# Altium PCB PCB1.PcbDoc (part 2 of 3)
Units mil, origin at the board's own origin, x right, y up, seen from the top; angles counter-clockwise.
Board outline 3543.31 x 5118.11 mil, 2 copper layers (Top Layer, Bottom Layer); 56 components, 55 nets, 300 pads, 86 vias.
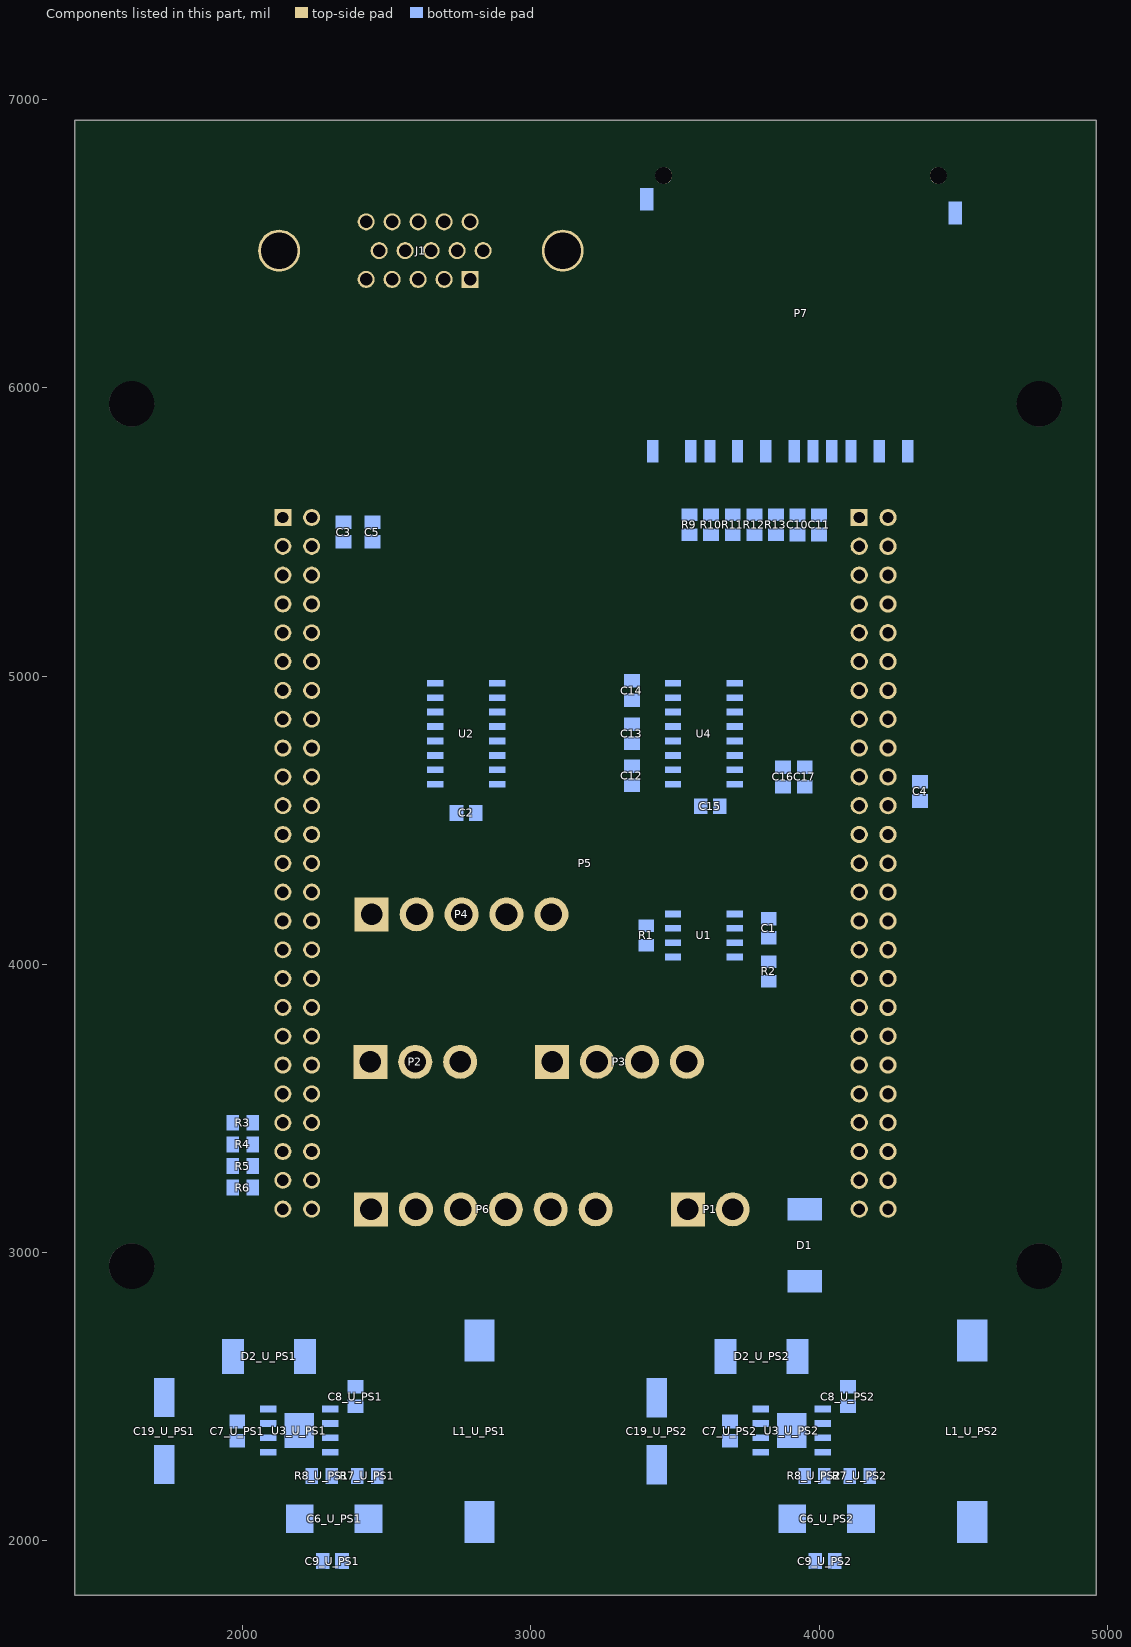
[diagram p2: the components of this part, seen from the top]

## Via types
v1: diameter 35.43/35.43 (per signal layer), hole 11.81, Top Layer to Bottom Layer, tented both sides, 52 vias
v2: diameter 47.24/47.24 (per signal layer), hole 19.68, Top Layer to Bottom Layer, tented both sides, 19 vias
v3: diameter 35.43, hole 11.81, Top Layer to Bottom Layer, tented top, 12 vias
v4: diameter 47.24/47.24 (per signal layer), hole 19.68, Top Layer to Bottom Layer, 3 vias

## Nets (pads, with @x,y where several pads share a name; then routed paths per layer and width w, separated by ;. In a path a pad name is that pad's centre, name@x,y a point inside that pad or via, vN(x,y) a via of type N, cw(c..) or ccw(c..) an arc to the next point about the centre after c; other vN are vias at no path point) (continued)
copper on no net: (continued)
  Bottom Layer w1: 1472.06,4827.6 1472.06,5448.6 ; 1473.06,4827.6 1473.06,5448.6 ; 1474.06,4827.6 1474.06,5448.6 ; 1475.06,4827.6 1475.06,5448.6 ; 1476.06,4827.6 1476.06,5448.6 ; 1477.06,4827.6 1477.06,5448.6 ; 1478.06,4827.6 1478.06,5448.6 ; 1479.06,4827.6 1479.06,5448.6 ; 1480.06,4827.6 1480.06,5448.6 ; 1481.06,4827.6 1481.06,5448.6 ; 1482.06,4827.6 1482.06,5448.6 ; 1483.06,4827.6 1483.06,5448.6 ; 1484.06,4827.6 1484.06,5448.6 ; 1485.06,4827.6 1485.06,5448.6 ; 1486.06,4827.6 1486.06,5448.6 ; 1487.06,4827.6 1487.06,5448.6 ; 1488.06,4827.6 1488.06,5448.6 ; 1489.06,4827.6 1489.06,5448.6 ; 1490.06,4827.6 1490.06,5448.6 ; 1491.06,4827.6 1491.06,5448.6 ; 1492.06,4827.6 1492.06,5448.6 ; 1493.06,4827.6 1493.06,5448.6 ; 1494.06,4827.6 1494.06,5448.6 ; 1495.06,4827.6 1495.06,5448.6 ; 1496.06,4827.6 1496.06,5448.6 ; 1497.06,4827.6 1497.06,5448.6 ; 1498.06,4827.6 1498.06,5448.6 ; 1499.06,4827.6 1499.06,5448.6 ; 1500.06,4827.6 1500.06,5448.6 ; 1501.06,4827.6 1501.06,5448.6 ; 1502.06,4827.6 1502.06,5448.6 ; 1503.06,4827.6 1503.06,5448.6 ; 1504.06,4827.6 1504.06,5448.6 ; 1505.06,4827.6 1505.06,5448.6 ; 1506.06,4827.6 1506.06,5448.6 ; 1507.06,4827.6 1507.06,5448.6 ; 1508.06,4827.6 1508.06,5448.6 ; 1509.06,4827.6 1509.06,5448.6 ; 1510.06,4827.6 1510.06,5327.6 ; 1510.06,5336.6 1510.06,5448.6 ; 1511.06,4827.6 1511.06,5324.6 ; 1511.06,5337.6 1511.06,5448.6 ; 1512.06,4827.6 1512.06,5321.6 ; 1512.06,5338.6 1512.06,5448.6 ; 1513.06,4827.6 1513.06,5319.6 ; 1513.06,5338.6 1513.06,5448.6 ; 1514.06,4827.6 1514.06,5317.6 ; 1514.06,5339.6 1514.06,5448.6 ; 1515.06,4827.6 1515.06,4861.6 ; 1515.06,4864.6 1515.06,4883.6 ; 1515.06,4910.6 1515.06,4957.6 ; 1515.06,4959.6 1515.06,4977.6 ; 1515.06,5007.6 1515.06,5017.6 ; 1515.06,5019.6 1515.06,5029.6 ; 1515.06,5031.6 1515.06,5072.6 ; 1515.06,5087.6 1515.06,5092.6 ; 1515.06,5121.6 1515.06,5316.6 ; 1515.06,5339.6 1515.06,5448.6 ; 1516.06,4827.6 1516.06,4860.6 ; 1516.06,4865.6 1516.06,4880.6 ; 1516.06,4913.6 1516.06,4955.6 ; 1516.06,4961.6 1516.06,4974.6 ; 1516.06,5009.6 1516.06,5015.6 ; 1516.06,5021.6 1516.06,5027.6 ; 1516.06,5033.6 1516.06,5069.6 ; 1516.06,5087.6 1516.06,5090.6 ; 1516.06,5124.6 1516.06,5314.6 ; 1516.06,5330.6 1516.06,5332.6 ; 1516.06,5339.6 1516.06,5448.6 ; 1517.06,4827.6 1517.06,4859.6 ; 1517.06,4866.6 1517.06,4878.6 ; 1517.06,4915.6 1517.06,4954.6 ; 1517.06,4961.6 1517.06,4972.6 ; 1517.06,5010.6 1517.06,5014.6 ; 1517.06,5022.6 1517.06,5026.6 ; 1517.06,5034.6 1517.06,5067.6 ; 1517.06,5087.6 1517.06,5089.6 ; 1517.06,5126.6 1517.06,5313.6 ; 1517.06,5328.6 1517.06,5333.6 ; 1517.06,5339.6 1517.06,5448.6 ; 1518.06,4827.6 1518.06,4859.6 ; 1518.06,4867.6 1518.06,4877.6 ; 1518.06,4916.6 1518.06,4954.6 ; 1518.06,4961.6 1518.06,4970.6 ; 1518.06,5010.6 1518.06,5014.6 ; 1518.06,5022.6 1518.06,5026.6 ; 1518.06,5034.6 1518.06,5066.6 ; 1518.06,5087.6 1518.06,5089.6 ; 1518.06,5127.6 1518.06,5312.6 ; 1518.06,5326.6 1518.06,5333.6 ; 1518.06,5339.6 1518.06,5448.6 ; 1519.06,4827.6 1519.06,4859.6 ; 1519.06,4867.6 1519.06,4876.6 ; 1519.06,4918.6 1519.06,4954.6 ; 1519.06,4961.6 1519.06,4969.6 ; 1519.06,5010.6 1519.06,5014.6 ; 1519.06,5022.6 1519.06,5026.6 ; 1519.06,5034.6 1519.06,5065.6 ; 1519.06,5087.6 1519.06,5089.6 ; 1519.06,5128.6 1519.06,5310.6 ; 1519.06,5325.6 1519.06,5334.6 ; 1519.06,5339.6 1519.06,5448.6 ; 1520.06,4827.6 1520.06,4859.6 ; 1520.06,4867.6 1520.06,4875.6 ; 1520.06,4919.6 1520.06,4954.6 ; 1520.06,4961.6 1520.06,4968.6 ; 1520.06,5010.6 1520.06,5014.6 ; 1520.06,5022.6 1520.06,5026.6 ; 1520.06,5034.6 1520.06,5064.6 ; 1520.06,5087.6 1520.06,5090.6 ; 1520.06,5129.6 1520.06,5309.6 ; 1520.06,5323.6 1520.06,5334.6 ; 1520.06,5339.6 1520.06,5448.6 ; 1521.06,4827.6 1521.06,4859.6 ; 1521.06,4867.6 1521.06,4874.6 ; 1521.06,4920.6 1521.06,4954.6 ; 1521.06,4961.6 1521.06,4968.6 ; 1521.06,5009.6 1521.06,5014.6 ; 1521.06,5022.6 1521.06,5026.6 ; 1521.06,5034.6 1521.06,5063.6 ; 1521.06,5087.6 1521.06,5090.6 ; 1521.06,5130.6 1521.06,5307.6 ; 1521.06,5322.6 1521.06,5333.6 ; 1521.06,5338.6 1521.06,5448.6 ; 1522.06,4827.6 1522.06,4859.6 ; 1522.06,4867.6 1522.06,4873.6 ; 1522.06,4885.6 1522.06,4908.6 ; 1522.06,4921.6 1522.06,4954.6 ; 1522.06,4961.6 1522.06,4967.6 ; 1522.06,4981.6 1522.06,5014.6 ; 1522.06,5022.6 1522.06,5026.6 ; 1522.06,5034.6 1522.06,5062.6 ; 1522.06,5075.6 1522.06,5080.6 ; 1522.06,5087.6 1522.06,5117.6 ; 1522.06,5131.6 1522.06,5305.6 ; 1522.06,5320.6 1522.06,5333.6 ; 1522.06,5338.6 1522.06,5448.6 ; 1523.06,4827.6 1523.06,4859.6 ; 1523.06,4867.6 1523.06,4873.6 ; 1523.06,4882.6 1523.06,4911.6 ; 1523.06,4921.6 1523.06,4954.6 ; 1523.06,4961.6 1523.06,4967.6 ; 1523.06,4976.6 1523.06,5014.6 ; 1523.06,5022.6 1523.06,5026.6 ; 1523.06,5034.6 1523.06,5061.6 ; 1523.06,5072.6 1523.06,5080.6 ; 1523.06,5087.6 1523.06,5122.6 ; 1523.06,5131.6 1523.06,5303.6 ; 1523.06,5319.6 1523.06,5333.6 ; 1523.06,5337.6 1523.06,5448.6 ; 1524.06,4827.6 1524.06,4859.6 ; 1524.06,4867.6 1524.06,4873.6 ; 1524.06,4881.6 1524.06,4912.6 ; 1524.06,4922.6 1524.06,4954.6 ; 1524.06,4961.6 1524.06,4966.6 ; 1524.06,4975.6 1524.06,5014.6 ; 1524.06,5022.6 1524.06,5026.6 ; 1524.06,5034.6 1524.06,5060.6 ; 1524.06,5070.6 1524.06,5079.6 ; 1524.06,5087.6 1524.06,5123.6 ; 1524.06,5131.6 1524.06,5300.6 ; 1524.06,5318.6 1524.06,5333.6 ; 1524.06,5337.6 1524.06,5448.6 ; 1525.06,4827.6 1525.06,4859.6 ; 1525.06,4867.6 1525.06,4872.6 ; 1525.06,4880.6 1525.06,4913.6 ; 1525.06,4923.6 1525.06,4954.6 ; 1525.06,4961.6 1525.06,4966.6 ; 1525.06,4974.6 1525.06,5014.6 ; 1525.06,5022.6 1525.06,5026.6 ; 1525.06,5034.6 1525.06,5059.6 ; 1525.06,5069.6 1525.06,5079.6 ; 1525.06,5087.6 1525.06,5123.6 ; 1525.06,5132.6 1525.06,5297.6 ; 1525.06,5320.6 1525.06,5333.6 ; 1525.06,5336.6 1525.06,5448.6 ; 1526.06,4827.6 1526.06,4859.6 ; 1526.06,4867.6 1526.06,4872.6 ; 1526.06,4880.6 1526.06,4914.6 ; 1526.06,4924.6 1526.06,4954.6 ; 1526.06,4961.6 1526.06,4966.6 ; 1526.06,4974.6 1526.06,5014.6 ; 1526.06,5022.6 1526.06,5026.6 ; 1526.06,5034.6 1526.06,5059.6 ; 1526.06,5068.6 1526.06,5079.6 ; 1526.06,5087.6 1526.06,5124.6 ; 1526.06,5132.6 1526.06,5294.6 ; 1526.06,5323.6 1526.06,5333.6 ; 1526.06,5335.6 1526.06,5448.6 ; 1527.06,4827.6 1527.06,4859.6 ; 1527.06,4867.6 1527.06,4872.6 ; 1527.06,4880.6 1527.06,4915.6 ; 1527.06,4924.6 1527.06,4954.6 ; 1527.06,4961.6 1527.06,4966.6 ; 1527.06,4974.6 1527.06,5014.6 ; 1527.06,5022.6 1527.06,5026.6 ; 1527.06,5034.6 1527.06,5058.6 ; 1527.06,5067.6 1527.06,5079.6 ; 1527.06,5087.6 1527.06,5124.6 ; 1527.06,5132.6 1527.06,5291.6 ; 1527.06,5325.6 1527.06,5448.6 ; 1528.06,4827.6 1528.06,4859.6 ; 1528.06,4867.6 1528.06,4872.6 ; 1528.06,4880.6 1528.06,4916.6 ; 1528.06,4925.6 1528.06,4954.6 ; 1528.06,4961.6 1528.06,4966.6 ; 1528.06,4974.6 1528.06,5014.6 ; 1528.06,5022.6 1528.06,5026.6 ; 1528.06,5034.6 1528.06,5057.6 ; 1528.06,5066.6 1528.06,5079.6 ; 1528.06,5087.6 1528.06,5124.6 ; 1528.06,5132.6 1528.06,5289.6 ; 1528.06,5327.6 1528.06,5448.6 ; 1529.06,4827.6 1529.06,4859.6 ; 1529.06,4867.6 1529.06,4872.6 ; 1529.06,4880.6 1529.06,4916.6 ; 1529.06,4926.6 1529.06,4954.6 ; 1529.06,4961.6 1529.06,4966.6 ; 1529.06,4974.6 1529.06,5014.6 ; 1529.06,5022.6 1529.06,5026.6 ; 1529.06,5034.6 1529.06,5056.6 ; 1529.06,5066.6 1529.06,5079.6 ; 1529.06,5087.6 1529.06,5124.6 ; 1529.06,5132.6 1529.06,5288.6 ; 1529.06,5328.6 1529.06,5448.6 ; 1530.06,4827.6 1530.06,4859.6 ; 1530.06,4867.6 1530.06,4872.6 ; 1530.06,4881.6 1530.06,4917.6 ; 1530.06,4926.6 1530.06,4954.6 ; 1530.06,4961.6 1530.06,4966.6 ; 1530.06,4974.6 1530.06,5014.6 ; 1530.06,5022.6 1530.06,5026.6 ; 1530.06,5034.6 1530.06,5056.6 ; 1530.06,5065.6 1530.06,5079.6 ; 1530.06,5087.6 1530.06,5124.6 ; 1530.06,5132.6 1530.06,5287.6 ; 1530.06,5329.6 1530.06,5448.6 ; 1531.06,4827.6 1531.06,4859.6 ; 1531.06,4867.6 1531.06,4873.6 ; 1531.06,4883.6 1531.06,4918.6 ; 1531.06,4927.6 1531.06,4954.6 ; 1531.06,4961.6 1531.06,4966.6 ; 1531.06,4974.6 1531.06,5014.6 ; 1531.06,5022.6 1531.06,5026.6 ; 1531.06,5034.6 1531.06,5055.6 ; 1531.06,5064.6 1531.06,5079.6 ; 1531.06,5087.6 1531.06,5124.6 ; 1531.06,5132.6 1531.06,5287.6 ; 1531.06,5330.6 1531.06,5448.6 ; 1532.06,4827.6 1532.06,4859.6 ; 1532.06,4867.6 1532.06,4873.6 ; 1532.06,4896.6 1532.06,4918.6 ; 1532.06,4927.6 1532.06,4954.6 ; 1532.06,4961.6 1532.06,4966.6 ; 1532.06,4974.6 1532.06,5014.6 ; 1532.06,5022.6 1532.06,5026.6 ; 1532.06,5034.6 1532.06,5054.6 ; 1532.06,5064.6 1532.06,5079.6 ; 1532.06,5087.6 1532.06,5101.6 ; 1532.06,5132.6 1532.06,5286.6 ; 1532.06,5331.6 1532.06,5448.6 ; 1533.06,4827.6 1533.06,4859.6 ; 1533.06,4867.6 1533.06,4873.6 ; 1533.06,4900.6 1533.06,4919.6 ; 1533.06,4928.6 1533.06,4954.6 ; 1533.06,4961.6 1533.06,4966.6 ; 1533.06,4974.6 1533.06,5014.6 ; 1533.06,5022.6 1533.06,5026.6 ; 1533.06,5034.6 1533.06,5054.6 ; 1533.06,5063.6 1533.06,5079.6 ; 1533.06,5087.6 1533.06,5099.6 ; 1533.06,5132.6 1533.06,5166.6 ; 1533.06,5168.6 1533.06,5285.6 ; 1533.06,5332.6 1533.06,5448.6 ; 1534.06,4827.6 1534.06,4859.6 ; 1534.06,4867.6 1534.06,4874.6 ; 1534.06,4902.6 1534.06,4920.6 ; 1534.06,4929.6 1534.06,4954.6 ; 1534.06,4961.6 1534.06,4966.6 ; 1534.06,4974.6 1534.06,5014.6 ; 1534.06,5022.6 1534.06,5026.6 ; 1534.06,5034.6 1534.06,5053.6 ; 1534.06,5062.6 1534.06,5079.6 ; 1534.06,5087.6 1534.06,5099.6 ; 1534.06,5132.6 1534.06,5166.6 ; 1534.06,5169.6 1534.06,5285.6 ; 1534.06,5332.6 1534.06,5448.6 ; 1535.06,4827.6 1535.06,4859.6 ; 1535.06,4866.6 1535.06,4875.6 ; 1535.06,4904.6 1535.06,4920.6 ; 1535.06,4929.6 1535.06,4954.6 ; 1535.06,4961.6 1535.06,4966.6 ; 1535.06,4974.6 1535.06,5014.6 ; 1535.06,5022.6 1535.06,5026.6 ; 1535.06,5034.6 1535.06,5052.6 ; 1535.06,5062.6 1535.06,5079.6 ; 1535.06,5087.6 1535.06,5099.6 ; 1535.06,5132.6 1535.06,5166.6 ; 1535.06,5170.6 1535.06,5284.6 ; 1535.06,5333.6 1535.06,5448.6 ; 1536.06,4827.6 1536.06,4859.6 ; 1536.06,4866.6 1536.06,4876.6 ; 1536.06,4905.6 1536.06,4921.6 ; 1536.06,4930.6 1536.06,4954.6 ; 1536.06,4961.6 1536.06,4966.6 ; 1536.06,4974.6 1536.06,5014.6 ; 1536.06,5022.6 1536.06,5026.6 ; 1536.06,5034.6 1536.06,5052.6 ; 1536.06,5061.6 1536.06,5079.6 ; 1536.06,5087.6 1536.06,5099.6 ; 1536.06,5132.6 1536.06,5157.6 ; 1536.06,5159.6 1536.06,5166.6 ; 1536.06,5171.6 1536.06,5283.6 ; 1536.06,5333.6 1536.06,5448.6 ; 1537.06,4827.6 1537.06,4859.6 ; 1537.06,4866.6 1537.06,4878.6 ; 1537.06,4906.6 1537.06,4921.6 ; 1537.06,4930.6 1537.06,4954.6 ; 1537.06,4961.6 1537.06,4966.6 ; 1537.06,4974.6 1537.06,5014.6 ; 1537.06,5022.6 1537.06,5026.6 ; 1537.06,5034.6 1537.06,5051.6 ; 1537.06,5060.6 1537.06,5079.6 ; 1537.06,5087.6 1537.06,5099.6 ; 1537.06,5132.6 1537.06,5157.6 ; 1537.06,5161.6 1537.06,5166.6 ; 1537.06,5171.6 1537.06,5283.6 ; 1537.06,5313.6 1537.06,5326.6 ; 1537.06,5334.6 1537.06,5448.6 ; 1538.06,4827.6 1538.06,4859.6 ; 1538.06,4866.6 1538.06,4881.6 ; 1538.06,4906.6 1538.06,4922.6 ; 1538.06,4931.6 1538.06,4954.6 ; 1538.06,4961.6 1538.06,4966.6 ; 1538.06,4974.6 1538.06,5014.6 ; 1538.06,5022.6 1538.06,5026.6 ; 1538.06,5034.6 1538.06,5051.6 ; 1538.06,5060.6 1538.06,5079.6 ; 1538.06,5087.6 1538.06,5100.6 ; 1538.06,5132.6 1538.06,5158.6 ; 1538.06,5163.6 1538.06,5167.6 ; 1538.06,5172.6 1538.06,5282.6 ; 1538.06,5314.6 1538.06,5326.6 ; 1538.06,5334.6 1538.06,5448.6 ; 1539.06,4827.6 1539.06,4859.6 ; 1539.06,4866.6 1539.06,4889.6 ; 1539.06,4907.6 1539.06,4923.6 ; 1539.06,4932.6 1539.06,4954.6 ; 1539.06,4961.6 1539.06,4966.6 ; 1539.06,4974.6 1539.06,5014.6 ; 1539.06,5022.6 1539.06,5026.6 ; 1539.06,5034.6 1539.06,5050.6 ; 1539.06,5059.6 1539.06,5079.6 ; 1539.06,5087.6 1539.06,5102.6 ; 1539.06,5132.6 1539.06,5159.6 ; 1539.06,5164.6 1539.06,5167.6 ; 1539.06,5173.6 1539.06,5282.6 ; 1539.06,5302.6 1539.06,5305.6 ; 1539.06,5314.6 1539.06,5327.6 ; 1539.06,5334.6 1539.06,5448.6 ; 1540.06,4827.6 1540.06,4859.6 ; 1540.06,4866.6 1540.06,4897.6 ; 1540.06,4907.6 1540.06,4923.6 ; 1540.06,4932.6 1540.06,4954.6 ; 1540.06,4961.6 1540.06,4966.6 ; 1540.06,4974.6 1540.06,5014.6 ; 1540.06,5022.6 1540.06,5026.6 ; 1540.06,5034.6 1540.06,5049.6 ; 1540.06,5058.6 1540.06,5079.6 ; 1540.06,5087.6 1540.06,5159.6 ; 1540.06,5165.6 1540.06,5167.6 ; 1540.06,5173.6 1540.06,5281.6 ; 1540.06,5301.6 1540.06,5306.6 ; 1540.06,5314.6 1540.06,5327.6 ; 1540.06,5334.6 1540.06,5448.6 ; 1541.06,4827.6 1541.06,4859.6 ; 1541.06,4866.6 1541.06,4899.6 ; 1541.06,4908.6 1541.06,4924.6 ; 1541.06,4933.6 1541.06,4954.6 ; 1541.06,4961.6 1541.06,4966.6 ; 1541.06,4974.6 1541.06,5014.6 ; 1541.06,5022.6 1541.06,5026.6 ; 1541.06,5034.6 1541.06,5048.6 ; 1541.06,5058.6 1541.06,5079.6 ; 1541.06,5087.6 1541.06,5125.6 ; 1541.06,5130.6 1541.06,5159.6 ; 1541.06,5165.6 1541.06,5167.6 ; 1541.06,5174.6 1541.06,5281.6 ; 1541.06,5300.6 1541.06,5307.6 ; 1541.06,5315.6 1541.06,5328.6 ; 1541.06,5334.6 1541.06,5448.6 ; 1542.06,4827.6 1542.06,4859.6 ; 1542.06,4867.6 1542.06,4900.6 ; 1542.06,4908.6 1542.06,4924.6 ; 1542.06,4934.6 1542.06,4954.6 ; 1542.06,4961.6 1542.06,4966.6 ; 1542.06,4974.6 1542.06,5014.6 ; 1542.06,5022.6 1542.06,5026.6 ; 1542.06,5034.6 1542.06,5048.6 ; 1542.06,5057.6 1542.06,5079.6 ; 1542.06,5087.6 1542.06,5124.6 ; 1542.06,5131.6 1542.06,5160.6 ; 1542.06,5166.6 1542.06,5167.6 ; 1542.06,5174.6 1542.06,5280.6 ; 1542.06,5299.6 1542.06,5308.6 ; 1542.06,5315.6 1542.06,5328.6 ; 1542.06,5334.6 1542.06,5448.6 ; 1543.06,4827.6 1543.06,4859.6 ; 1543.06,4867.6 1543.06,4900.6 ; 1543.06,4908.6 1543.06,4925.6 ; 1543.06,4934.6 1543.06,4954.6 ; 1543.06,4961.6 1543.06,4966.6 ; 1543.06,4974.6 1543.06,5014.6 ; 1543.06,5022.6 1543.06,5026.6 ; 1543.06,5034.6 1543.06,5047.6 ; 1543.06,5056.6 1543.06,5080.6 ; 1543.06,5087.6 1543.06,5124.6 ; 1543.06,5132.6 1543.06,5160.6 ; 1543.06,5175.6 1543.06,5279.6 ; 1543.06,5298.6 1543.06,5308.6 ; 1543.06,5315.6 1543.06,5328.6 ; 1543.06,5334.6 1543.06,5448.6 ; 1544.06,4827.6 1544.06,4859.6 ; 1544.06,4867.6 1544.06,4900.6 ; 1544.06,4908.6 1544.06,4926.6 ; 1544.06,4935.6 1544.06,4954.6 ; 1544.06,4961.6 1544.06,4966.6 ; 1544.06,4974.6 1544.06,5014.6 ; 1544.06,5022.6 1544.06,5026.6 ; 1544.06,5034.6 1544.06,5046.6 ; 1544.06,5056.6 1544.06,5080.6 ; 1544.06,5087.6 1544.06,5124.6 ; 1544.06,5132.6 1544.06,5160.6 ; 1544.06,5167.6 1544.06,5168.6 ; 1544.06,5175.6 1544.06,5279.6 ; 1544.06,5297.6 1544.06,5309.6 ; 1544.06,5315.6 1544.06,5328.6 ; 1544.06,5333.6 1544.06,5448.6 ; 1545.06,4827.6 1545.06,4859.6 ; 1545.06,4867.6 1545.06,4900.6 ; 1545.06,4908.6 1545.06,4926.6 ; 1545.06,4936.6 1545.06,4954.6 ; 1545.06,4961.6 1545.06,4966.6 ; 1545.06,4974.6 1545.06,5014.6 ; 1545.06,5022.6 1545.06,5026.6 ; 1545.06,5034.6 1545.06,5045.6 ; 1545.06,5055.6 1545.06,5080.6 ; 1545.06,5088.6 1545.06,5124.6 ; 1545.06,5132.6 1545.06,5161.6 ; 1545.06,5176.6 1545.06,5278.6 ; 1545.06,5296.6 1545.06,5309.6 ; 1545.06,5315.6 1545.06,5327.6 ; 1545.06,5333.6 1545.06,5448.6 ; 1546.06,4827.6 1546.06,4859.6 ; 1546.06,4867.6 1546.06,4900.6 ; 1546.06,4908.6 1546.06,4927.6 ; 1546.06,4937.6 1546.06,4954.6 ; 1546.06,4961.6 1546.06,4966.6 ; 1546.06,4974.6 1546.06,5014.6 ; 1546.06,5022.6 1546.06,5026.6 ; 1546.06,5034.6 1546.06,5044.6 ; 1546.06,5054.6 1546.06,5080.6 ; 1546.06,5088.6 1546.06,5123.6 ; 1546.06,5132.6 1546.06,5161.6 ; 1546.06,5176.6 1546.06,5277.6 ; 1546.06,5296.6 1546.06,5309.6 ; 1546.06,5314.6 1546.06,5327.6 ; 1546.06,5333.6 1546.06,5448.6 ; 1547.06,4827.6 1547.06,4859.6 ; 1547.06,4868.6 1547.06,4899.6 ; 1547.06,4908.6 1547.06,4928.6 ; 1547.06,4938.6 1547.06,4954.6 ; 1547.06,4961.6 1547.06,4966.6 ; 1547.06,4975.6 1547.06,5014.6 ; 1547.06,5022.6 1547.06,5026.6 ; 1547.06,5034.6 1547.06,5043.6 ; 1547.06,5053.6 1547.06,5080.6 ; 1547.06,5089.6 1547.06,5123.6 ; 1547.06,5131.6 1547.06,5161.6 ; 1547.06,5177.6 1547.06,5276.6 ; 1547.06,5295.6 1547.06,5308.6 ; 1547.06,5314.6 1547.06,5326.6 ; 1547.06,5333.6 1547.06,5448.6 ; 1548.06,4827.6 1548.06,4860.6 ; 1548.06,4869.6 1548.06,4898.6 ; 1548.06,4907.6 1548.06,4929.6 ; 1548.06,4940.6 1548.06,4954.6 ; 1548.06,4961.6 1548.06,4967.6 ; 1548.06,4976.6 1548.06,5014.6 ; 1548.06,5022.6 1548.06,5026.6 ; 1548.06,5034.6 1548.06,5042.6 ; 1548.06,5053.6 1548.06,5080.6 ; 1548.06,5090.6 1548.06,5122.6 ; 1548.06,5131.6 1548.06,5161.6 ; 1548.06,5178.6 1548.06,5181.6 ; 1548.06,5183.6 1548.06,5275.6 ; 1548.06,5295.6 1548.06,5308.6 ; 1548.06,5314.6 1548.06,5326.6 ; 1548.06,5332.6 1548.06,5448.6 ; 1549.06,4827.6 1549.06,4860.6 ; 1549.06,4907.6 1549.06,4929.6 ; 1549.06,4961.6 1549.06,4967.6 ; 1549.06,5008.6 1549.06,5014.6 ; 1549.06,5022.6 1549.06,5026.6 ; 1549.06,5052.6 1549.06,5081.6 ; 1549.06,5130.6 1549.06,5161.6 ; 1549.06,5183.6 1549.06,5275.6 ; 1549.06,5295.6 1549.06,5307.6 ; 1549.06,5313.6 1549.06,5325.6 ; 1549.06,5331.6 1549.06,5448.6 ; 1550.06,4827.6 1550.06,4861.6 ; 1550.06,4906.6 1550.06,4930.6 ; 1550.06,4961.6 1550.06,4968.6 ; 1550.06,5009.6 1550.06,5014.6 ; 1550.06,5022.6 1550.06,5026.6 ; 1550.06,5051.6 1550.06,5082.6 ; 1550.06,5130.6 1550.06,5161.6 ; 1550.06,5183.6 1550.06,5274.6 ; 1550.06,5294.6 1550.06,5307.6 ; 1550.06,5312.6 1550.06,5324.6 ; 1550.06,5330.6 1550.06,5448.6 ; 1551.06,4827.6 1551.06,4861.6 ; 1551.06,4906.6 1551.06,4931.6 ; 1551.06,4961.6 1551.06,4968.6 ; 1551.06,5010.6 1551.06,5014.6 ; 1551.06,5022.6 1551.06,5026.6 ; 1551.06,5050.6 1551.06,5082.6 ; 1551.06,5129.6 1551.06,5161.6 ; 1551.06,5183.6 1551.06,5273.6 ; 1551.06,5294.6 1551.06,5306.6 ; 1551.06,5310.6 1551.06,5324.6 ; 1551.06,5327.6 1551.06,5448.6 ; 1552.06,4827.6 1552.06,4862.6 ; 1552.06,4905.6 1552.06,4932.6 ; 1552.06,4961.6 1552.06,4969.6 ; 1552.06,5010.6 1552.06,5014.6 ; 1552.06,5022.6 1552.06,5026.6 ; 1552.06,5049.6 1552.06,5083.6 ; 1552.06,5128.6 1552.06,5161.6 ; 1552.06,5184.6 1552.06,5272.6 ; 1552.06,5294.6 1552.06,5306.6 ; 1552.06,5308.6 1552.06,5448.6 ; 1553.06,4827.6 1553.06,4863.6 ; 1553.06,4904.6 1553.06,4934.6 ; 1553.06,4961.6 1553.06,4970.6 ; 1553.06,5010.6 1553.06,5014.6 ; 1553.06,5022.6 1553.06,5026.6 ; 1553.06,5048.6 1553.06,5084.6 ; 1553.06,5127.6 1553.06,5161.6 ; 1553.06,5184.6 1553.06,5271.6 ; 1553.06,5294.6 1553.06,5448.6 ; 1554.06,4827.6 1554.06,4865.6 ; 1554.06,4902.6 1554.06,4935.6 ; 1554.06,4961.6 1554.06,4972.6 ; 1554.06,5010.6 1554.06,5014.6 ; 1554.06,5022.6 1554.06,5026.6 ; 1554.06,5046.6 1554.06,5086.6 ; 1554.06,5126.6 1554.06,5161.6 ; 1554.06,5184.6 1554.06,5270.6 ; 1554.06,5293.6 1554.06,5448.6 ; 1555.06,4827.6 1555.06,4867.6 ; 1555.06,4900.6 1555.06,4937.6 ; 1555.06,4961.6 1555.06,4974.6 ; 1555.06,5008.6 1555.06,5015.6 ; 1555.06,5021.6 1555.06,5026.6 ; 1555.06,5045.6 1555.06,5088.6 ; 1555.06,5124.6 1555.06,5160.6 ; 1555.06,5185.6 1555.06,5269.6 ; 1555.06,5293.6 1555.06,5448.6 ; 1556.06,4827.6 1556.06,5160.6 ; 1556.06,5185.6 1556.06,5268.6 ; 1556.06,5293.6 1556.06,5448.6 ; 1557.06,4827.6 1557.06,5159.6 ; 1557.06,5186.6 1557.06,5267.6 ; 1557.06,5293.6 1557.06,5448.6 ; 1558.06,4827.6 1558.06,5157.6 ; 1558.06,5187.6 1558.06,5266.6 ; 1558.06,5293.6 1558.06,5448.6 ; 1559.06,4827.6 1559.06,5156.6 ; 1559.06,5187.6 1559.06,5265.6 ; 1559.06,5292.6 1559.06,5448.6 ; 1560.06,4827.6 1560.06,5154.6 ; 1560.06,5188.6 1560.06,5264.6 ; 1560.06,5292.6 1560.06,5448.6 ; 1561.06,4827.6 1561.06,5154.6 ; 1561.06,5189.6 1561.06,5263.6 ; 1561.06,5292.6 1561.06,5448.6 ; 1562.06,4827.6 1562.06,5156.6 ; 1562.06,5190.6 1562.06,5262.6 ; 1562.06,5291.6 1562.06,5448.6 ; 1563.06,4827.6 1563.06,5156.6 ; 1563.06,5190.6 1563.06,5262.6 ; 1563.06,5291.6 1563.06,5448.6 ; 1564.06,4827.6 1564.06,5155.6 ; 1564.06,5191.6 1564.06,5261.6 ; 1564.06,5291.6 1564.06,5448.6 ; 1565.06,4827.6 1565.06,5155.6 ; 1565.06,5192.6 1565.06,5261.6 ; 1565.06,5290.6 1565.06,5448.6 ; 1566.06,4827.6 1566.06,5155.6 ; 1566.06,5193.6 1566.06,5260.6 ; 1566.06,5290.6 1566.06,5448.6 ; 1567.06,4827.6 1567.06,4857.6 ; 1567.06,4929.6 1567.06,4932.6 ; 1567.06,5023.6 1567.06,5051.6 ; 1567.06,5074.6 1567.06,5111.6 ; 1567.06,5134.6 1567.06,5155.6 ; 1567.06,5194.6 1567.06,5259.6 ; 1567.06,5289.6 1567.06,5448.6 ; 1568.06,4827.6 1568.06,4857.6 ; 1568.06,4929.6 1568.06,4932.6 ; 1568.06,5027.6 1568.06,5051.6 ; 1568.06,5074.6 1568.06,5111.6 ; 1568.06,5134.6 1568.06,5155.6 ; 1568.06,5196.6 1568.06,5258.6 ; 1568.06,5289.6 1568.06,5448.6 ; 1569.06,4827.6 1569.06,4857.6 ; 1569.06,4929.6 1569.06,4932.6 ; 1569.06,5029.6 1569.06,5051.6 ; 1569.06,5074.6 1569.06,5111.6 ; 1569.06,5134.6 1569.06,5155.6 ; 1569.06,5197.6 1569.06,5257.6 ; 1569.06,5288.6 1569.06,5448.6 ; 1570.06,4827.6 1570.06,4858.6 ; 1570.06,4929.6 1570.06,4932.6 ; 1570.06,5031.6 1570.06,5051.6 ; 1570.06,5074.6 1570.06,5111.6 ; 1570.06,5134.6 1570.06,5155.6 ; 1570.06,5163.6 1570.06,5165.6 ; 1570.06,5198.6 1570.06,5256.6 ; 1570.06,5288.6 1570.06,5448.6 ; 1571.06,4827.6 1571.06,4858.6 ; 1571.06,4929.6 1571.06,4932.6 ; 1571.06,5033.6 1571.06,5051.6 ; 1571.06,5074.6 1571.06,5111.6 ; 1571.06,5134.6 1571.06,5155.6 ; 1571.06,5163.6 1571.06,5167.6 ; 1571.06,5199.6 1571.06,5254.6 ; 1571.06,5288.6 1571.06,5345.6 ; 1571.06,5354.6 1571.06,5448.6 ; 1572.06,4827.6 1572.06,4859.6 ; 1572.06,4929.6 1572.06,4932.6 ; 1572.06,5034.6 1572.06,5051.6 ; 1572.06,5074.6 1572.06,5111.6 ; 1572.06,5134.6 1572.06,5155.6 ; 1572.06,5162.6 1572.06,5168.6 ; 1572.06,5201.6 1572.06,5230.6 ; 1572.06,5233.6 1572.06,5252.6 ; 1572.06,5287.6 1572.06,5343.6 ; 1572.06,5357.6 1572.06,5363.6 ; 1572.06,5364.6 1572.06,5448.6 ; 1573.06,4827.6 1573.06,4859.6 ; 1573.06,4929.6 1573.06,4932.6 ; 1573.06,5036.6 1573.06,5051.6 ; 1573.06,5074.6 1573.06,5111.6 ; 1573.06,5134.6 1573.06,5156.6 ; 1573.06,5162.6 1573.06,5169.6 ; 1573.06,5203.6 1573.06,5228.6 ; 1573.06,5234.6 1573.06,5249.6 ; 1573.06,5287.6 1573.06,5342.6 ; 1573.06,5358.6 1573.06,5363.6 ; 1573.06,5367.6 1573.06,5448.6 ; 1574.06,4827.6 1574.06,4859.6 ; 1574.06,4929.6 1574.06,4932.6 ; 1574.06,5037.6 1574.06,5051.6 ; 1574.06,5074.6 1574.06,5111.6 ; 1574.06,5134.6 1574.06,5158.6 ; 1574.06,5161.6 1574.06,5169.6 ; 1574.06,5204.6 1574.06,5227.6 ; 1574.06,5236.6 1574.06,5246.6 ; 1574.06,5287.6 1574.06,5341.6 ; 1574.06,5360.6 1574.06,5364.6 ; 1574.06,5369.6 1574.06,5448.6 ; 1575.06,4827.6 1575.06,4860.6 ; 1575.06,4929.6 1575.06,4932.6 ; 1575.06,5038.6 1575.06,5051.6 ; 1575.06,5074.6 1575.06,5111.6 ; 1575.06,5134.6 1575.06,5158.6 ; 1575.06,5160.6 1575.06,5170.6 ; 1575.06,5207.6 1575.06,5225.6 ; 1575.06,5237.6 1575.06,5244.6 ; 1575.06,5286.6 1575.06,5340.6 ; 1575.06,5361.6 1575.06,5365.6 ; 1575.06,5371.6 1575.06,5448.6 ; 1576.06,4827.6 1576.06,4860.6 ; 1576.06,4929.6 1576.06,4932.6 ; 1576.06,5039.6 1576.06,5051.6 ; 1576.06,5074.6 1576.06,5111.6 ; 1576.06,5134.6 1576.06,5170.6 ; 1576.06,5210.6 1576.06,5223.6 ; 1576.06,5238.6 1576.06,5242.6 ; 1576.06,5286.6 1576.06,5340.6 ; 1576.06,5363.6 1576.06,5366.6 ; 1576.06,5373.6 1576.06,5448.6 ; 1577.06,4827.6 1577.06,4861.6 ; 1577.06,4929.6 1577.06,4932.6 ; 1577.06,5040.6 1577.06,5051.6 ; 1577.06,5074.6 1577.06,5111.6 ; 1577.06,5134.6 1577.06,5171.6 ; 1577.06,5239.6 1577.06,5243.6 ; 1577.06,5286.6 1577.06,5340.6 ; 1577.06,5364.6 1577.06,5366.6 ; 1577.06,5374.6 1577.06,5448.6 ; 1578.06,4827.6 1578.06,4861.6 ; 1578.06,4929.6 1578.06,4932.6 ; 1578.06,5041.6 1578.06,5051.6 ; 1578.06,5074.6 1578.06,5111.6 ; 1578.06,5134.6 1578.06,5171.6 ; 1578.06,5241.6 1578.06,5245.6 ; 1578.06,5286.6 1578.06,5339.6 ; 1578.06,5365.6 1578.06,5367.6 ; 1578.06,5375.6 1578.06,5448.6 ; 1579.06,4827.6 1579.06,4862.6 ; 1579.06,4929.6 1579.06,4932.6 ; 1579.06,5042.6 1579.06,5051.6 ; 1579.06,5074.6 1579.06,5111.6 ; 1579.06,5134.6 1579.06,5172.6 ; 1579.06,5242.6 1579.06,5245.6 ; 1579.06,5263.6 1579.06,5264.6 ; 1579.06,5285.6 1579.06,5339.6 ; 1579.06,5366.6 1579.06,5368.6 ; 1579.06,5376.6 1579.06,5448.6 ; 1580.06,4827.6 1580.06,4862.6 ; 1580.06,4929.6 1580.06,4932.6 ; 1580.06,5042.6 1580.06,5051.6 ; 1580.06,5074.6 1580.06,5111.6 ; 1580.06,5134.6 1580.06,5173.6 ; 1580.06,5242.6 1580.06,5245.6 ; 1580.06,5262.6 1580.06,5263.6 ; 1580.06,5285.6 1580.06,5339.6 ; 1580.06,5367.6 1580.06,5369.6 ; 1580.06,5378.6 1580.06,5448.6 ; 1581.06,4827.6 1581.06,4863.6 ; 1581.06,4929.6 1581.06,4932.6 ; 1581.06,5043.6 1581.06,5051.6 ; 1581.06,5074.6 1581.06,5111.6 ; 1581.06,5134.6 1581.06,5173.6 ; 1581.06,5242.6 1581.06,5244.6 ; 1581.06,5260.6 1581.06,5263.6 ; 1581.06,5285.6 1581.06,5339.6 ; 1581.06,5368.6 1581.06,5370.6 ; 1581.06,5379.6 1581.06,5448.6 ; 1582.06,4827.6 1582.06,4863.6 ; 1582.06,4929.6 1582.06,4932.6 ; 1582.06,5044.6 1582.06,5051.6 ; 1582.06,5074.6 1582.06,5111.6 ; 1582.06,5134.6 1582.06,5174.6 ; 1582.06,5241.6 1582.06,5244.6 ; 1582.06,5259.6 1582.06,5263.6 ; 1582.06,5285.6 1582.06,5340.6 ; 1582.06,5368.6 1582.06,5371.6 ; 1582.06,5379.6 1582.06,5448.6 ; 1583.06,4827.6 1583.06,4864.6 ; 1583.06,4929.6 1583.06,4932.6 ; 1583.06,5044.6 1583.06,5051.6 ; 1583.06,5074.6 1583.06,5111.6 ; 1583.06,5134.6 1583.06,5174.6 ; 1583.06,5240.6 1583.06,5243.6 ; 1583.06,5257.6 1583.06,5263.6 ; 1583.06,5285.6 1583.06,5341.6 ; 1583.06,5369.6 1583.06,5371.6 ; 1583.06,5380.6 1583.06,5448.6 ; 1584.06,4827.6 1584.06,4864.6 ; 1584.06,4929.6 1584.06,4932.6 ; 1584.06,5045.6 1584.06,5051.6 ; 1584.06,5074.6 1584.06,5111.6 ; 1584.06,5134.6 1584.06,5175.6 ; 1584.06,5239.6 1584.06,5242.6 ; 1584.06,5256.6 1584.06,5263.6 ; 1584.06,5285.6 1584.06,5342.6 ; 1584.06,5357.6 1584.06,5358.6 ; 1584.06,5370.6 1584.06,5372.6 ; 1584.06,5381.6 1584.06,5448.6 ; 1585.06,4827.6 1585.06,4864.6 ; 1585.06,4929.6 1585.06,4932.6 ; 1585.06,5045.6 1585.06,5051.6 ; 1585.06,5074.6 1585.06,5111.6 ; 1585.06,5134.6 1585.06,5175.6 ; 1585.06,5238.6 1585.06,5241.6 ; 1585.06,5254.6 1585.06,5262.6 ; 1585.06,5285.6 1585.06,5343.6 ; 1585.06,5357.6 1585.06,5360.6 ; 1585.06,5371.6 1585.06,5373.6 ; 1585.06,5382.6 1585.06,5448.6 ; 1586.06,4827.6 1586.06,4865.6 ; 1586.06,4929.6 1586.06,4932.6 ; 1586.06,5045.6 1586.06,5051.6 ; 1586.06,5074.6 1586.06,5111.6 ; 1586.06,5134.6 1586.06,5176.6 ; 1586.06,5237.6 1586.06,5240.6 ; 1586.06,5252.6 1586.06,5256.6 ; 1586.06,5260.6 1586.06,5262.6 ; 1586.06,5285.6 1586.06,5344.6 ; 1586.06,5358.6 1586.06,5362.6 ; 1586.06,5371.6 1586.06,5374.6 ; 1586.06,5383.6 1586.06,5448.6 ; 1587.06,4827.6 1587.06,4865.6 ; 1587.06,4929.6 1587.06,4932.6 ; 1587.06,5046.6 1587.06,5051.6 ; 1587.06,5074.6 1587.06,5111.6 ; 1587.06,5134.6 1587.06,5176.6 ; 1587.06,5236.6 1587.06,5238.6 ; 1587.06,5249.6 1587.06,5254.6 ; 1587.06,5260.6 1587.06,5262.6 ; 1587.06,5285.6 1587.06,5339.6 ; 1587.06,5340.6 1587.06,5345.6 ; 1587.06,5358.6 1587.06,5363.6 ; 1587.06,5372.6 1587.06,5374.6 ; 1587.06,5384.6 1587.06,5448.6 ; 1588.06,4827.6 1588.06,4866.6 ; 1588.06,4891.6 1588.06,4932.6 ; 1588.06,4956.6 1588.06,5019.6 ; 1588.06,5046.6 1588.06,5051.6 ; 1588.06,5074.6 1588.06,5111.6 ; 1588.06,5134.6 1588.06,5176.6 ; 1588.06,5234.6 1588.06,5237.6 ; 1588.06,5246.6 1588.06,5252.6 ; 1588.06,5260.6 1588.06,5262.6 ; 1588.06,5286.6 1588.06,5339.6 ; 1588.06,5341.6 1588.06,5346.6 ; 1588.06,5358.6 1588.06,5364.6 ; 1588.06,5373.6 1588.06,5375.6 ; 1588.06,5384.6 1588.06,5448.6 ; 1589.06,4827.6 1589.06,4866.6 ; 1589.06,4892.6 1589.06,4932.6 ; 1589.06,4956.6 1589.06,5021.6 ; 1589.06,5046.6 1589.06,5051.6 ; 1589.06,5074.6 1589.06,5111.6 ; 1589.06,5134.6 1589.06,5176.6 ; 1589.06,5233.6 1589.06,5236.6 ; 1589.06,5243.6 1589.06,5249.6 ; 1589.06,5260.6 1589.06,5262.6 ; 1589.06,5286.6 1589.06,5339.6 ; 1589.06,5341.6 1589.06,5347.6 ; 1589.06,5358.6 1589.06,5365.6 ; 1589.06,5373.6 1589.06,5375.6 ; 1589.06,5385.6 1589.06,5448.6 ; 1590.06,4827.6 1590.06,4867.6 ; 1590.06,4892.6 1590.06,4932.6 ; 1590.06,4956.6 1590.06,5022.6 ; 1590.06,5046.6 1590.06,5051.6 ; 1590.06,5074.6 1590.06,5111.6 ; 1590.06,5134.6 1590.06,5176.6 ; 1590.06,5231.6 1590.06,5236.6 ; 1590.06,5239.6 1590.06,5246.6 ; 1590.06,5261.6 1590.06,5262.6 ; 1590.06,5287.6 1590.06,5339.6 ; 1590.06,5342.6 1590.06,5348.6 ; 1590.06,5359.6 1590.06,5361.6 ; 1590.06,5363.6 1590.06,5366.6 ; 1590.06,5374.6 1590.06,5376.6 ; 1590.06,5386.6 1590.06,5448.6 ; 1591.06,4827.6 1591.06,4867.6 ; 1591.06,4893.6 1591.06,4932.6 ; 1591.06,4956.6 1591.06,4959.6 ; 1591.06,4983.6 1591.06,5023.6 ; 1591.06,5046.6 1591.06,5051.6 ; 1591.06,5074.6 1591.06,5111.6 ; 1591.06,5134.6 1591.06,5176.6 ; 1591.06,5229.6 1591.06,5243.6 ; 1591.06,5261.6 1591.06,5262.6 ; 1591.06,5288.6 1591.06,5338.6 ; 1591.06,5342.6 1591.06,5344.6 ; 1591.06,5346.6 1591.06,5348.6 ; 1591.06,5359.6 1591.06,5361.6 ; 1591.06,5364.6 1591.06,5366.6 ; 1591.06,5374.6 1591.06,5376.6 ; 1591.06,5386.6 1591.06,5448.6 ; 1592.06,4827.6 1592.06,4868.6 ; 1592.06,4893.6 1592.06,4932.6 ; 1592.06,4956.6 1592.06,4959.6 ; 1592.06,4983.6 1592.06,5023.6 ; 1592.06,5046.6 1592.06,5051.6 ; 1592.06,5074.6 1592.06,5111.6 ; 1592.06,5134.6 1592.06,5176.6 ; 1592.06,5228.6 1592.06,5240.6 ; 1592.06,5261.6 1592.06,5262.6 ; 1592.06,5291.6 1592.06,5338.6 ; 1592.06,5342.6 1592.06,5344.6 ; 1592.06,5347.6 1592.06,5349.6 ; 1592.06,5359.6 1592.06,5361.6 ; 1592.06,5365.6 1592.06,5367.6 ; 1592.06,5374.6 1592.06,5377.6 ; 1592.06,5387.6 1592.06,5448.6 ; 1593.06,4827.6 1593.06,4868.6 ; 1593.06,4893.6 1593.06,4932.6 ; 1593.06,4956.6 1593.06,4959.6 ; 1593.06,4983.6 1593.06,5023.6 ; 1593.06,5047.6 1593.06,5051.6 ; 1593.06,5074.6 1593.06,5111.6 ; 1593.06,5134.6 1593.06,5176.6 ; 1593.06,5226.6 1593.06,5236.6 ; 1593.06,5261.6 1593.06,5262.6 ; 1593.06,5295.6 1593.06,5338.6 ; 1593.06,5342.6 1593.06,5344.6 ; 1593.06,5347.6 1593.06,5349.6 ; 1593.06,5359.6 1593.06,5361.6 ; 1593.06,5366.6 1593.06,5368.6 ; 1593.06,5375.6 1593.06,5377.6 ; 1593.06,5387.6 1593.06,5448.6 ; 1594.06,4827.6 1594.06,4869.6 ; 1594.06,4894.6 1594.06,4932.6 ; 1594.06,4956.6 1594.06,4959.6 ; 1594.06,4983.6 1594.06,5024.6 ; 1594.06,5047.6 1594.06,5051.6 ; 1594.06,5074.6 1594.06,5111.6 ; 1594.06,5134.6 1594.06,5176.6 ; 1594.06,5224.6 1594.06,5233.6 ; 1594.06,5261.6 1594.06,5263.6 ; 1594.06,5299.6 1594.06,5338.6 ; 1594.06,5343.6 1594.06,5344.6 ; 1594.06,5348.6 1594.06,5350.6 ; 1594.06,5359.6 1594.06,5361.6 ; 1594.06,5366.6 1594.06,5369.6 ; 1594.06,5375.6 1594.06,5377.6 ; 1594.06,5387.6 1594.06,5448.6 ; 1595.06,4827.6 1595.06,4869.6 ; 1595.06,4894.6 1595.06,4932.6 ; 1595.06,4956.6 1595.06,4959.6 ; 1595.06,4983.6 1595.06,5024.6 ; 1595.06,5047.6 1595.06,5051.6 ; 1595.06,5074.6 1595.06,5111.6 ; 1595.06,5134.6 1595.06,5175.6 ; 1595.06,5222.6 1595.06,5229.6 ; 1595.06,5261.6 1595.06,5263.6 ; 1595.06,5301.6 1595.06,5338.6 ; 1595.06,5343.6 1595.06,5344.6 ; 1595.06,5348.6 1595.06,5350.6 ; 1595.06,5360.6 1595.06,5361.6 ; 1595.06,5367.6 1595.06,5369.6 ; 1595.06,5375.6 1595.06,5377.6 ; 1595.06,5388.6 1595.06,5448.6 ; 1596.06,4827.6 1596.06,4870.6 ; 1596.06,4895.6 1596.06,4932.6 ; 1596.06,4956.6 1596.06,4959.6 ; 1596.06,4983.6 1596.06,5024.6 ; 1596.06,5047.6 1596.06,5051.6 ; 1596.06,5074.6 1596.06,5111.6 ; 1596.06,5134.6 1596.06,5152.6 ; 1596.06,5154.6 1596.06,5175.6 ; 1596.06,5220.6 1596.06,5226.6 ; 1596.06,5261.6 1596.06,5263.6 ; 1596.06,5302.6 1596.06,5337.6 ; 1596.06,5343.6 1596.06,5345.6 ; 1596.06,5349.6 1596.06,5351.6 ; 1596.06,5360.6 1596.06,5362.6 ; 1596.06,5368.6 1596.06,5370.6 ; 1596.06,5375.6 1596.06,5377.6 ; 1596.06,5388.6 1596.06,5448.6 ; 1597.06,4827.6 1597.06,4870.6 ; 1597.06,4895.6 1597.06,4932.6 ; 1597.06,4956.6 1597.06,4959.6 ; 1597.06,4983.6 1597.06,5000.6 ; 1597.06,5134.6 1597.06,5145.6 ; 1597.06,5147.6 1597.06,5152.6 ; 1597.06,5155.6 1597.06,5175.6 ; 1597.06,5219.6 1597.06,5223.6 ; 1597.06,5261.6 1597.06,5263.6 ; 1597.06,5302.6 1597.06,5337.6 ; 1597.06,5343.6 1597.06,5345.6 ; 1597.06,5349.6 1597.06,5351.6 ; 1597.06,5360.6 1597.06,5362.6 ; 1597.06,5368.6 1597.06,5371.6 ; 1597.06,5375.6 1597.06,5377.6 ; 1597.06,5388.6 1597.06,5448.6 ; 1598.06,4827.6 1598.06,4871.6 ; 1598.06,4896.6 1598.06,4932.6 ; 1598.06,4956.6 1598.06,4959.6 ; 1598.06,4983.6 1598.06,5000.6 ; 1598.06,5134.6 1598.06,5145.6 ; 1598.06,5147.6 1598.06,5152.6 ; 1598.06,5155.6 1598.06,5174.6 ; 1598.06,5217.6 1598.06,5220.6 ; 1598.06,5262.6 1598.06,5264.6 ; 1598.06,5303.6 1598.06,5337.6 ; 1598.06,5343.6 1598.06,5345.6 ; 1598.06,5349.6 1598.06,5351.6 ; 1598.06,5360.6 1598.06,5362.6 ; 1598.06,5369.6 1598.06,5372.6 ; 1598.06,5375.6 1598.06,5377.6 ; 1598.06,5388.6 1598.06,5448.6 ; 1599.06,4827.6 1599.06,4871.6 ; 1599.06,4896.6 1599.06,4932.6 ; 1599.06,4956.6 1599.06,4959.6 ; 1599.06,4983.6 1599.06,5000.6 ; 1599.06,5134.6 1599.06,5144.6 ; 1599.06,5147.6 1599.06,5152.6 ; 1599.06,5155.6 1599.06,5173.6 ; 1599.06,5262.6 1599.06,5264.6 ; 1599.06,5303.6 1599.06,5336.6 ; 1599.06,5343.6 1599.06,5345.6 ; 1599.06,5350.6 1599.06,5352.6 ; 1599.06,5361.6 1599.06,5362.6 ; 1599.06,5369.6 1599.06,5374.6 ; 1599.06,5375.6 1599.06,5377.6 ; 1599.06,5388.6 1599.06,5448.6 ; 1600.06,4827.6 1600.06,4872.6 ; 1600.06,4897.6 1600.06,4932.6 ; 1600.06,4956.6 1600.06,4959.6 ; 1600.06,4983.6 1600.06,5000.6 ; 1600.06,5134.6 1600.06,5144.6 ; 1600.06,5147.6 1600.06,5152.6 ; 1600.06,5155.6 1600.06,5173.6 ; 1600.06,5262.6 1600.06,5264.6 ; 1600.06,5303.6 1600.06,5335.6 ; 1600.06,5343.6 1600.06,5345.6 ; 1600.06,5350.6 1600.06,5352.6 ; 1600.06,5361.6 1600.06,5362.6 ; 1600.06,5370.6 1600.06,5377.6 ; 1600.06,5388.6 1600.06,5448.6 ; 1601.06,4827.6 1601.06,4872.6 ; 1601.06,4897.6 1601.06,4932.6 ; 1601.06,4956.6 1601.06,4959.6 ; 1601.06,4983.6 1601.06,5000.6 ; 1601.06,5134.6 1601.06,5144.6 ; 1601.06,5148.6 1601.06,5151.6 ; 1601.06,5155.6 1601.06,5172.6 ; 1601.06,5263.6 1601.06,5265.6 ; 1601.06,5304.6 1601.06,5334.6 ; 1601.06,5343.6 1601.06,5345.6 ; 1601.06,5350.6 1601.06,5352.6 ; 1601.06,5361.6 1601.06,5362.6 ; 1601.06,5370.6 1601.06,5377.6 ; 1601.06,5388.6 1601.06,5448.6 ; 1602.06,4827.6 1602.06,4873.6 ; 1602.06,4898.6 1602.06,4932.6 ; 1602.06,4956.6 1602.06,4959.6 ; 1602.06,4983.6 1602.06,5000.6 ; 1602.06,5134.6 1602.06,5144.6 ; 1602.06,5148.6 1602.06,5151.6 ; 1602.06,5155.6 1602.06,5170.6 ; 1602.06,5263.6 1602.06,5265.6 ; 1602.06,5304.6 1602.06,5331.6 ; 1602.06,5343.6 1602.06,5345.6 ; 1602.06,5351.6 1602.06,5353.6 ; 1602.06,5361.6 1602.06,5363.6 ; 1602.06,5371.6 1602.06,5373.6 ; 1602.06,5388.6 1602.06,5448.6 ; 1603.06,4827.6 1603.06,4873.6 ; 1603.06,4898.6 1603.06,4932.6 ; 1603.06,4956.6 1603.06,4959.6 ; 1603.06,4983.6 1603.06,5000.6 ; 1603.06,5134.6 1603.06,5143.6 ; 1603.06,5148.6 1603.06,5150.6 ; 1603.06,5155.6 1603.06,5168.6 ; 1603.06,5264.6 1603.06,5266.6 ; 1603.06,5304.6 1603.06,5330.6 ; 1603.06,5343.6 1603.06,5345.6 ; 1603.06,5351.6 1603.06,5353.6 ; 1603.06,5361.6 1603.06,5363.6 ; 1603.06,5371.6 1603.06,5373.6 ; 1603.06,5388.6 1603.06,5448.6 ; 1604.06,4827.6 1604.06,4874.6 ; 1604.06,4899.6 1604.06,4932.6 ; 1604.06,4956.6 1604.06,4959.6 ; 1604.06,4983.6 1604.06,5000.6 ; 1604.06,5134.6 1604.06,5143.6 ; 1604.06,5158.6 1604.06,5160.6 ; 1604.06,5264.6 1604.06,5266.6 ; 1604.06,5304.6 1604.06,5329.6 ; 1604.06,5343.6 1604.06,5345.6 ; 1604.06,5351.6 1604.06,5353.6 ; 1604.06,5361.6 1604.06,5363.6 ; 1604.06,5371.6 1604.06,5373.6 ; 1604.06,5388.6 1604.06,5448.6 ; 1605.06,4827.6 1605.06,4874.6 ; 1605.06,4899.6 1605.06,4932.6 ; 1605.06,4956.6 1605.06,4959.6 ; 1605.06,4983.6 1605.06,5000.6 ; 1605.06,5134.6 1605.06,5143.6 ; 1605.06,5264.6 1605.06,5267.6 ; 1605.06,5305.6 1605.06,5328.6 ; 1605.06,5343.6 1605.06,5345.6 ; 1605.06,5351.6 1605.06,5353.6 ; 1605.06,5361.6 1605.06,5363.6 ; 1605.06,5372.6 1605.06,5373.6 ; 1605.06,5388.6 1605.06,5448.6 ; 1606.06,4827.6 1606.06,4875.6 ; 1606.06,4900.6 1606.06,4932.6 ; 1606.06,4956.6 1606.06,4959.6 ; 1606.06,4983.6 1606.06,5000.6 ; 1606.06,5134.6 1606.06,5142.6 ; 1606.06,5265.6 1606.06,5267.6 ; 1606.06,5305.6 1606.06,5328.6 ; 1606.06,5342.6 1606.06,5345.6 ; 1606.06,5352.6 1606.06,5353.6 ; 1606.06,5361.6 1606.06,5363.6 ; 1606.06,5372.6 1606.06,5373.6 ; 1606.06,5388.6 1606.06,5448.6 ; 1607.06,4827.6 1607.06,4875.6 ; 1607.06,4900.6 1607.06,4932.6 ; 1607.06,4956.6 1607.06,4959.6 ; 1607.06,4983.6 1607.06,5000.6 ; 1607.06,5134.6 1607.06,5142.6 ; 1607.06,5265.6 1607.06,5267.6 ; 1607.06,5305.6 1607.06,5327.6 ; 1607.06,5342.6 1607.06,5344.6 ; 1607.06,5352.6 1607.06,5354.6 ; 1607.06,5361.6 1607.06,5363.6 ; 1607.06,5372.6 1607.06,5374.6 ; 1607.06,5388.6 1607.06,5448.6 ; 1608.06,4827.6 1608.06,4876.6 ; 1608.06,4901.6 1608.06,4932.6 ; 1608.06,4956.6 1608.06,4959.6 ; 1608.06,4983.6 1608.06,5000.6 ; 1608.06,5134.6 1608.06,5142.6 ; 1608.06,5266.6 1608.06,5268.6 ; 1608.06,5305.6 1608.06,5325.6 ; 1608.06,5342.6 1608.06,5344.6 ; 1608.06,5352.6 1608.06,5354.6 ; 1608.06,5362.6 1608.06,5363.6 ; 1608.06,5372.6 1608.06,5374.6 ; 1608.06,5388.6 1608.06,5448.6 ; 1609.06,4827.6 1609.06,4876.6 ; 1609.06,4901.6 1609.06,4932.6 ; 1609.06,4956.6 1609.06,4959.6 ; 1609.06,4983.6 1609.06,5000.6 ; 1609.06,5134.6 1609.06,5141.6 ; 1609.06,5266.6 1609.06,5268.6 ; 1609.06,5305.6 1609.06,5321.6 ; 1609.06,5341.6 1609.06,5343.6 ; 1609.06,5352.6 1609.06,5354.6 ; 1609.06,5362.6 1609.06,5363.6 ; 1609.06,5372.6 1609.06,5374.6 ; 1609.06,5388.6 1609.06,5448.6 ; 1610.06,4827.6 1610.06,4877.6 ; 1610.06,4902.6 1610.06,4932.6 ; 1610.06,4956.6 1610.06,4959.6 ; 1610.06,4983.6 1610.06,5000.6 ; 1610.06,5134.6 1610.06,5141.6 ; 1610.06,5267.6 1610.06,5269.6 ; 1610.06,5305.6 1610.06,5318.6 ; 1610.06,5341.6 1610.06,5343.6 ; 1610.06,5352.6 1610.06,5354.6 ; 1610.06,5362.6 1610.06,5363.6 ; 1610.06,5372.6 1610.06,5374.6 ; 1610.06,5387.6 1610.06,5448.6 ; 1611.06,4827.6 1611.06,4877.6 ; 1611.06,4902.6 1611.06,4932.6 ; 1611.06,4956.6 1611.06,4959.6 ; 1611.06,4983.6 1611.06,5000.6 ; 1611.06,5134.6 1611.06,5141.6 ; 1611.06,5267.6 1611.06,5269.6 ; 1611.06,5306.6 1611.06,5315.6 ; 1611.06,5341.6 1611.06,5342.6 ; 1611.06,5353.6 1611.06,5354.6 ; 1611.06,5362.6 1611.06,5363.6 ; 1611.06,5373.6 1611.06,5374.6 ; 1611.06,5387.6 1611.06,5448.6 ; 1612.06,4827.6 1612.06,4878.6 ; 1612.06,4903.6 1612.06,4932.6 ; 1612.06,4956.6 1612.06,4959.6 ; 1612.06,4983.6 1612.06,5000.6 ; 1612.06,5134.6 1612.06,5140.6 ; 1612.06,5268.6 1612.06,5270.6 ; 1612.06,5306.6 1612.06,5314.6 ; 1612.06,5340.6 1612.06,5342.6 ; 1612.06,5353.6 1612.06,5355.6 ; 1612.06,5361.6 1612.06,5363.6 ; 1612.06,5373.6 1612.06,5375.6 ; 1612.06,5386.6 1612.06,5448.6 ; 1613.06,4827.6 1613.06,4878.6 ; 1613.06,4903.6 1613.06,4932.6 ; 1613.06,4956.6 1613.06,4959.6 ; 1613.06,4983.6 1613.06,5000.6 ; 1613.06,5134.6 1613.06,5140.6 ; 1613.06,5268.6 1613.06,5270.6 ; 1613.06,5306.6 1613.06,5312.6 ; 1613.06,5340.6 1613.06,5342.6 ; 1613.06,5353.6 1613.06,5355.6 ; 1613.06,5361.6 1613.06,5363.6 ; 1613.06,5373.6 1613.06,5375.6 ; 1613.06,5385.6 1613.06,5448.6 ; 1614.06,4827.6 1614.06,4878.6 ; 1614.06,4904.6 1614.06,4932.6 ; 1614.06,4956.6 1614.06,4959.6 ; 1614.06,4983.6 1614.06,5000.6 ; 1614.06,5134.6 1614.06,5140.6 ; 1614.06,5269.6 1614.06,5271.6 ; 1614.06,5306.6 1614.06,5311.6 ; 1614.06,5340.6 1614.06,5342.6 ; 1614.06,5353.6 1614.06,5355.6 ; 1614.06,5360.6 1614.06,5363.6 ; 1614.06,5373.6 1614.06,5375.6 ; 1614.06,5384.6 1614.06,5448.6 ; 1615.06,4827.6 1615.06,4879.6 ; 1615.06,4904.6 1615.06,4932.6 ; 1615.06,4956.6 1615.06,4959.6 ; 1615.06,4983.6 1615.06,5000.6 ; 1615.06,5134.6 1615.06,5140.6 ; 1615.06,5269.6 1615.06,5271.6 ; 1615.06,5306.6 1615.06,5310.6 ; 1615.06,5340.6 1615.06,5343.6 ; 1615.06,5353.6 1615.06,5355.6 ; 1615.06,5360.6 1615.06,5362.6 ; 1615.06,5373.6 1615.06,5375.6 ; 1615.06,5383.6 1615.06,5448.6 ; 1616.06,4827.6 1616.06,4879.6 ; 1616.06,4905.6 1616.06,4932.6 ; 1616.06,4956.6 1616.06,4959.6 ; 1616.06,4983.6 1616.06,5000.6 ; 1616.06,5134.6 1616.06,5140.6 ; 1616.06,5270.6 1616.06,5272.6 ; 1616.06,5306.6 1616.06,5309.6 ; 1616.06,5340.6 1616.06,5343.6 ; 1616.06,5353.6 1616.06,5355.6 ; 1616.06,5373.6 1616.06,5378.6 ; 1616.06,5380.6 1616.06,5448.6 ; 1617.06,4827.6 1617.06,4880.6 ; 1617.06,4905.6 1617.06,4932.6 ; 1617.06,4956.6 1617.06,4959.6 ; 1617.06,4983.6 1617.06,5000.6 ; 1617.06,5134.6 1617.06,5140.6 ; 1617.06,5270.6 1617.06,5272.6 ; 1617.06,5292.6 1617.06,5307.6 ; 1617.06,5341.6 1617.06,5343.6 ; 1617.06,5353.6 1617.06,5355.6 ; 1617.06,5373.6 1617.06,5448.6 ; 1618.06,4827.6 1618.06,4880.6 ; 1618.06,4906.6 1618.06,4932.6 ; 1618.06,4956.6 1618.06,4959.6 ; 1618.06,4983.6 1618.06,5051.6 ; 1618.06,5074.6 1618.06,5111.6 ; 1618.06,5134.6 1618.06,5140.6 ; 1618.06,5271.6 1618.06,5273.6 ; 1618.06,5289.6 1618.06,5306.6 ; 1618.06,5354.6 1618.06,5356.6 ; 1618.06,5373.6 1618.06,5448.6 ; 1619.06,4827.6 1619.06,4881.6 ; 1619.06,4907.6 1619.06,4932.6 ; 1619.06,4956.6 1619.06,4959.6 ; 1619.06,4983.6 1619.06,5051.6 ; 1619.06,5074.6 1619.06,5111.6 ; 1619.06,5134.6 1619.06,5140.6 ; 1619.06,5170.6 1619.06,5174.6 ; 1619.06,5272.6 1619.06,5274.6 ; 1619.06,5286.6 1619.06,5294.6 ; 1619.06,5354.6 1619.06,5356.6 ; 1619.06,5373.6 1619.06,5448.6 ; 1620.06,4827.6 1620.06,4881.6 ; 1620.06,4908.6 1620.06,4932.6 ; 1620.06,4956.6 1620.06,4959.6 ; 1620.06,4983.6 1620.06,5051.6 ; 1620.06,5074.6 1620.06,5111.6 ; 1620.06,5134.6 1620.06,5140.6 ; 1620.06,5172.6 1620.06,5174.6 ; 1620.06,5272.6 1620.06,5274.6 ; 1620.06,5284.6 1620.06,5289.6 ; 1620.06,5354.6 1620.06,5356.6 ; 1620.06,5373.6 1620.06,5448.6 ; 1621.06,4827.6 1621.06,4882.6 ; 1621.06,4908.6 1621.06,4932.6 ; 1621.06,4956.6 1621.06,4959.6 ; 1621.06,4983.6 1621.06,5024.6 ; 1621.06,5047.6 1621.06,5051.6 ; 1621.06,5074.6 1621.06,5111.6 ; 1621.06,5134.6 1621.06,5140.6 ; 1621.06,5173.6 1621.06,5174.6 ; 1621.06,5273.6 1621.06,5275.6 ; 1621.06,5282.6 1621.06,5286.6 ; 1621.06,5354.6 1621.06,5356.6 ; 1621.06,5373.6 1621.06,5448.6 ; 1622.06,4827.6 1622.06,4882.6 ; 1622.06,4909.6 1622.06,4932.6 ; 1622.06,4956.6 1622.06,4960.6 ; 1622.06,4983.6 1622.06,5023.6 ; 1622.06,5047.6 1622.06,5051.6 ; 1622.06,5074.6 1622.06,5111.6 ; 1622.06,5134.6 1622.06,5141.6 ; 1622.06,5215.6 1622.06,5217.6 ; 1622.06,5274.6 1622.06,5276.6 ; 1622.06,5281.6 1622.06,5284.6 ; 1622.06,5354.6 1622.06,5356.6 ; 1622.06,5373.6 1622.06,5448.6 ; 1623.06,4827.6 1623.06,4883.6 ; 1623.06,4911.6 1623.06,4932.6 ; 1623.06,4956.6 1623.06,4960.6 ; 1623.06,4984.6 1623.06,5023.6 ; 1623.06,5047.6 1623.06,5051.6 ; 1623.06,5074.6 1623.06,5111.6 ; 1623.06,5134.6 1623.06,5142.6 ; 1623.06,5218.6 1623.06,5220.6 ; 1623.06,5274.6 1623.06,5276.6 ; 1623.06,5280.6 1623.06,5283.6 ; 1623.06,5354.6 1623.06,5356.6 ; 1623.06,5373.6 1623.06,5448.6 ; 1624.06,4827.6 1624.06,4883.6 ; 1624.06,4912.6 1624.06,4932.6 ; 1624.06,4956.6 1624.06,4960.6 ; 1624.06,4985.6 1624.06,5022.6 ; 1624.06,5047.6 1624.06,5051.6 ; 1624.06,5074.6 1624.06,5111.6 ; 1624.06,5134.6 1624.06,5143.6 ; 1624.06,5220.6 1624.06,5224.6 ; 1624.06,5275.6 1624.06,5278.6 ; 1624.06,5279.6 1624.06,5281.6 ; 1624.06,5354.6 1624.06,5356.6 ; 1624.06,5373.6 1624.06,5448.6 ; 1625.06,4827.6 1625.06,4884.6 ; 1625.06,4914.6 1625.06,4932.6 ; 1625.06,4956.6 1625.06,4960.6 ; 1625.06,4986.6 1625.06,5021.6 ; 1625.06,5047.6 1625.06,5051.6 ; 1625.06,5074.6 1625.06,5111.6 ; 1625.06,5134.6 1625.06,5145.6 ; 1625.06,5223.6 1625.06,5227.6 ; 1625.06,5275.6 1625.06,5281.6 ; 1625.06,5354.6 1625.06,5356.6 ; 1625.06,5373.6 1625.06,5448.6 ; 1626.06,4827.6 1626.06,4884.6 ; 1626.06,4916.6 1626.06,4932.6 ; 1626.06,4956.6 1626.06,4960.6 ; 1626.06,4987.6 1626.06,5019.6 ; 1626.06,5046.6 1626.06,5051.6 ; 1626.06,5074.6 1626.06,5111.6 ; 1626.06,5134.6 1626.06,5157.6 ; 1626.06,5177.6 1626.06,5178.6 ; 1626.06,5188.6 1626.06,5193.6 ; 1626.06,5226.6 1626.06,5231.6 ; 1626.06,5276.6 1626.06,5280.6 ; 1626.06,5354.6 1626.06,5356.6 ; 1626.06,5373.6 1626.06,5448.6 ; 1627.06,4827.6 1627.06,4885.6 ; 1627.06,4956.6 1627.06,4961.6 ; 1627.06,5046.6 1627.06,5051.6 ; 1627.06,5074.6 1627.06,5111.6 ; 1627.06,5134.6 1627.06,5163.6 ; 1627.06,5173.6 1627.06,5179.6 ; 1627.06,5188.6 1627.06,5196.6 ; 1627.06,5228.6 1627.06,5234.6 ; 1627.06,5277.6 1627.06,5280.6 ; 1627.06,5354.6 1627.06,5356.6 ; 1627.06,5373.6 1627.06,5448.6 ; 1628.06,4827.6 1628.06,4886.6 ; 1628.06,4956.6 1628.06,4961.6 ; 1628.06,5046.6 1628.06,5051.6 ; 1628.06,5074.6 1628.06,5111.6 ; 1628.06,5134.6 1628.06,5164.6 ; 1628.06,5171.6 1628.06,5181.6 ; 1628.06,5188.6 1628.06,5198.6 ; 1628.06,5230.6 1628.06,5238.6 ; 1628.06,5277.6 1628.06,5280.6 ; 1628.06,5354.6 1628.06,5357.6 ; 1628.06,5373.6 1628.06,5448.6 ; 1629.06,4827.6 1629.06,4886.6 ; 1629.06,4956.6 1629.06,4961.6 ; 1629.06,5045.6 1629.06,5051.6 ; 1629.06,5074.6 1629.06,5111.6 ; 1629.06,5134.6 1629.06,5165.6 ; 1629.06,5170.6 1629.06,5181.6 ; 1629.06,5188.6 1629.06,5200.6 ; 1629.06,5233.6 1629.06,5241.6 ; 1629.06,5257.6 1629.06,5280.6 ; 1629.06,5354.6 1629.06,5357.6 ; 1629.06,5373.6 1629.06,5448.6 ; 1630.06,4827.6 1630.06,4887.6 ; 1630.06,4956.6 1630.06,4962.6 ; 1630.06,5045.6 1630.06,5051.6 ; 1630.06,5074.6 1630.06,5111.6 ; 1630.06,5134.6 1630.06,5165.6 ; 1630.06,5170.6 1630.06,5182.6 ; 1630.06,5188.6 1630.06,5201.6 ; 1630.06,5235.6 1630.06,5245.6 ; 1630.06,5248.6 1630.06,5280.6 ; 1630.06,5354.6 1630.06,5357.6 ; 1630.06,5373.6 1630.06,5448.6 ; 1631.06,4827.6 1631.06,4888.6 ; 1631.06,4956.6 1631.06,4962.6 ; 1631.06,5044.6 1631.06,5051.6 ; 1631.06,5074.6 1631.06,5111.6 ; 1631.06,5134.6 1631.06,5165.6 ; 1631.06,5169.6 1631.06,5183.6 ; 1631.06,5188.6 1631.06,5202.6 ; 1631.06,5238.6 1631.06,5275.6 ; 1631.06,5279.6 1631.06,5281.6 ; 1631.06,5354.6 1631.06,5357.6 ; 1631.06,5372.6 1631.06,5448.6 ; 1632.06,4827.6 1632.06,4888.6 ; 1632.06,4956.6 1632.06,4963.6 ; 1632.06,5044.6 1632.06,5051.6 ; 1632.06,5074.6 1632.06,5111.6 ; 1632.06,5134.6 1632.06,5184.6 ; 1632.06,5188.6 1632.06,5202.6 ; 1632.06,5241.6 1632.06,5274.6 ; 1632.06,5279.6 1632.06,5281.6 ; 1632.06,5338.6 1632.06,5341.6 ; 1632.06,5354.6 1632.06,5358.6 ; 1632.06,5372.6 1632.06,5448.6 ; 1633.06,4827.6 1633.06,4889.6 ; 1633.06,4956.6 1633.06,4963.6 ; 1633.06,5043.6 1633.06,5051.6 ; 1633.06,5074.6 1633.06,5111.6 ; 1633.06,5134.6 1633.06,5185.6 ; 1633.06,5188.6 1633.06,5203.6 ; 1633.06,5243.6 1633.06,5273.6 ; 1633.06,5279.6 1633.06,5281.6 ; 1633.06,5335.6 1633.06,5341.6 ; 1633.06,5354.6 1633.06,5359.6 ; 1633.06,5371.6 1633.06,5448.6 ; 1634.06,4827.6 1634.06,4890.6 ; 1634.06,4956.6 1634.06,4964.6 ; 1634.06,5043.6 1634.06,5051.6 ; 1634.06,5074.6 1634.06,5111.6 ; 1634.06,5134.6 1634.06,5186.6 ; 1634.06,5188.6 1634.06,5203.6 ; 1634.06,5244.6 1634.06,5273.6 ; 1634.06,5278.6 1634.06,5281.6 ; 1634.06,5334.6 1634.06,5342.6 ; 1634.06,5353.6 1634.06,5360.6 ; 1634.06,5370.6 1634.06,5448.6 ; 1635.06,4827.6 1635.06,4891.6 ; 1635.06,4956.6 1635.06,4965.6 ; 1635.06,5042.6 1635.06,5051.6 ; 1635.06,5074.6 1635.06,5111.6 ; 1635.06,5134.6 1635.06,5203.6 ; 1635.06,5245.6 1635.06,5273.6 ; 1635.06,5278.6 1635.06,5281.6 ; 1635.06,5332.6 1635.06,5343.6 ; 1635.06,5351.6 1635.06,5362.6 ; 1635.06,5368.6 1635.06,5448.6 ; 1636.06,4827.6 1636.06,4892.6 ; 1636.06,4956.6 1636.06,4966.6 ; 1636.06,5041.6 1636.06,5051.6 ; 1636.06,5074.6 1636.06,5111.6 ; 1636.06,5134.6 1636.06,5203.6 ; 1636.06,5246.6 1636.06,5273.6 ; 1636.06,5278.6 1636.06,5280.6 ; 1636.06,5331.6 1636.06,5448.6 ; 1637.06,4827.6 1637.06,4893.6 ; 1637.06,4956.6 1637.06,4966.6 ; 1637.06,5040.6 1637.06,5051.6 ; 1637.06,5074.6 1637.06,5111.6 ; 1637.06,5134.6 1637.06,5203.6 ; 1637.06,5246.6 1637.06,5273.6 ; 1637.06,5278.6 1637.06,5280.6 ; 1637.06,5330.6 1637.06,5448.6 ; 1638.06,4827.6 1638.06,4894.6 ; 1638.06,4956.6 1638.06,4967.6 ; 1638.06,5039.6 1638.06,5051.6 ; 1638.06,5074.6 1638.06,5111.6 ; 1638.06,5134.6 1638.06,5204.6 ; 1638.06,5247.6 1638.06,5273.6 ; 1638.06,5278.6 1638.06,5280.6 ; 1638.06,5329.6 1638.06,5448.6 ; 1639.06,4827.6 1639.06,4895.6 ; 1639.06,4956.6 1639.06,4968.6 ; 1639.06,5038.6 1639.06,5051.6 ; 1639.06,5074.6 1639.06,5111.6 ; 1639.06,5134.6 1639.06,5204.6 ; 1639.06,5247.6 1639.06,5273.6 ; 1639.06,5278.6 1639.06,5280.6 ; 1639.06,5328.6 1639.06,5448.6 ; 1640.06,4827.6 1640.06,4897.6 ; 1640.06,4956.6 1640.06,4970.6 ; 1640.06,5037.6 1640.06,5051.6 ; 1640.06,5074.6 1640.06,5111.6 ; 1640.06,5134.6 1640.06,5204.6 ; 1640.06,5248.6 1640.06,5273.6 ; 1640.06,5278.6 1640.06,5281.6 ; 1640.06,5327.6 1640.06,5448.6 ; 1641.06,4827.6 1641.06,4898.6 ; 1641.06,4956.6 1641.06,4971.6 ; 1641.06,5036.6 1641.06,5051.6 ; 1641.06,5074.6 1641.06,5111.6 ; 1641.06,5134.6 1641.06,5204.6 ; 1641.06,5209.6 1641.06,5210.6 ; 1641.06,5248.6 1641.06,5273.6 ; 1641.06,5279.6 1641.06,5281.6 ; 1641.06,5326.6 1641.06,5448.6 ; 1642.06,4827.6 1642.06,4900.6 ; 1642.06,4956.6 1642.06,4972.6 ; 1642.06,5034.6 1642.06,5051.6 ; 1642.06,5074.6 1642.06,5111.6 ; 1642.06,5134.6 1642.06,5204.6 ; 1642.06,5210.6 1642.06,5211.6 ; 1642.06,5249.6 1642.06,5274.6 ; 1642.06,5279.6 1642.06,5282.6 ; 1642.06,5324.6 1642.06,5448.6 ; 1643.06,4827.6 1643.06,4902.6 ; 1643.06,4956.6 1643.06,4974.6 ; 1643.06,5032.6 1643.06,5051.6 ; 1643.06,5074.6 1643.06,5111.6 ; 1643.06,5134.6 1643.06,5204.6 ; 1643.06,5210.6 1643.06,5211.6 ; 1643.06,5250.6 1643.06,5274.6 ; 1643.06,5280.6 1643.06,5282.6 ; 1643.06,5323.6 1643.06,5448.6 ; 1644.06,4827.6 1644.06,4904.6 ; 1644.06,4956.6 1644.06,4976.6 ; 1644.06,5031.6 1644.06,5051.6 ; 1644.06,5074.6 1644.06,5111.6 ; 1644.06,5134.6 1644.06,5204.6 ; 1644.06,5210.6 1644.06,5212.6 ; 1644.06,5250.6 1644.06,5275.6 ; 1644.06,5280.6 1644.06,5283.6 ; 1644.06,5322.6 1644.06,5448.6 ; 1645.06,4827.6 1645.06,4907.6 ; 1645.06,4956.6 1645.06,4978.6 ; 1645.06,5028.6 1645.06,5051.6